# Altium PCB FrontPlate.PcbDoc
Units mil, origin at the board's own origin, x right, y up, seen from the top; angles counter-clockwise.
Board outline 3307.09 x 1122.05 mil, 2 copper layers (Top Layer, Bottom Layer), stack 42.17 mil thick; 1 components, 1 nets, 8 pads, 0 vias.
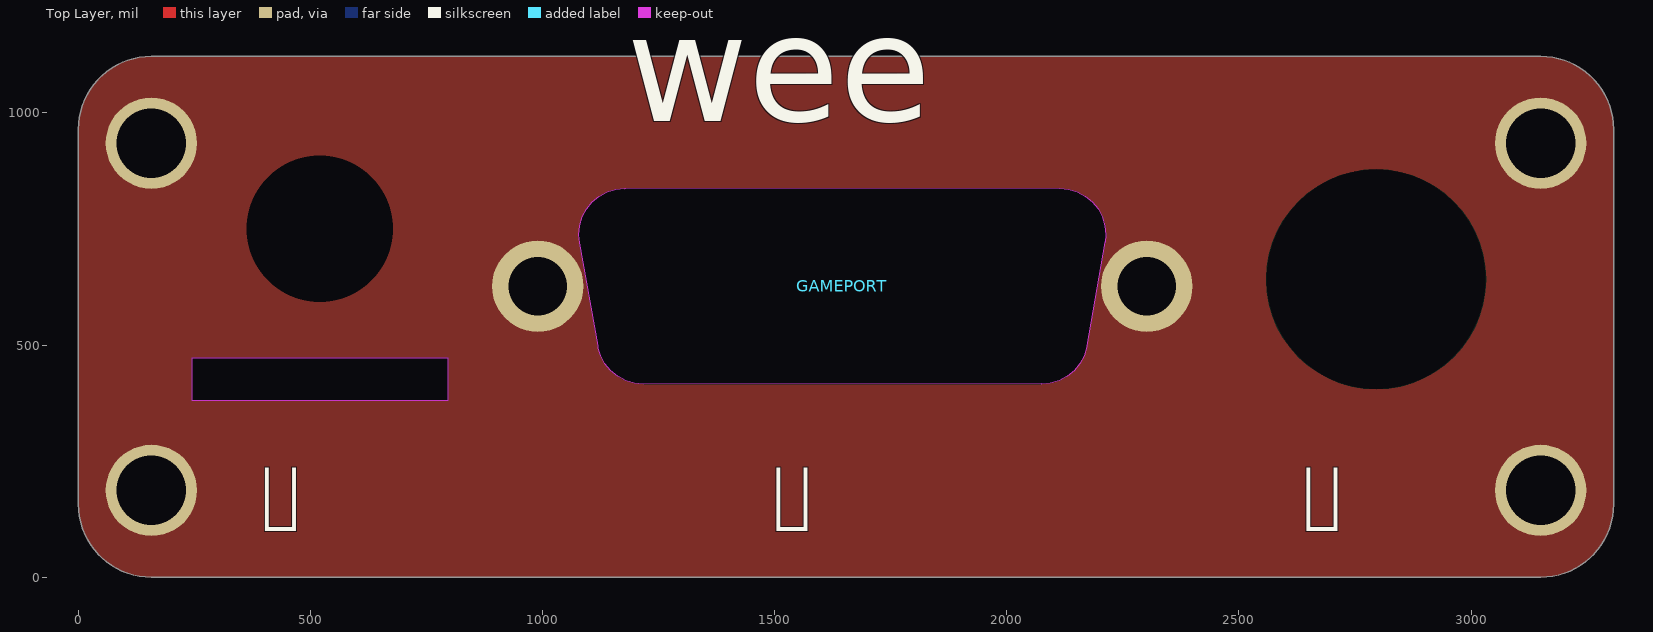
[diagram p0: Top Layer view]
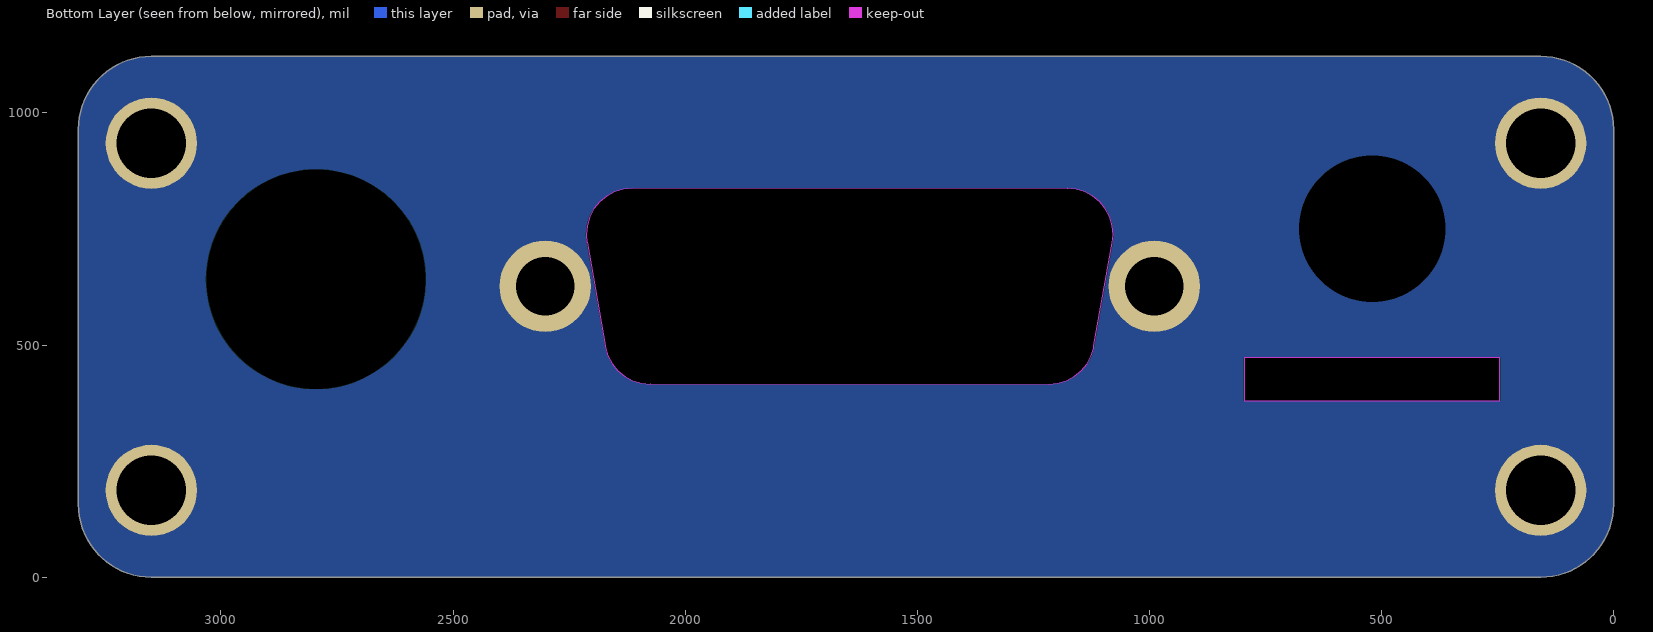
[diagram p1: Bottom Layer view, seen from below]

## Layer stack, top to bottom
Top Solder: solder mask 1, Solder Resist, Dk 3.5
Top Layer: signal copper 1.4
Dielectric 1: core 39.3701, FR-4, Dk 4.6
Bottom Layer: signal copper 1.4
Bottom Solder: solder mask 1, Solder Resist, Dk 3.5

## Board outline
157.48,0 cw(c157.48,157.48) 0,157.48 0,964.57 cw(c157.48,964.57) 157.48,1122.05 344.49,1122.05 2962.6,1122.05 3149.61,1122.05 cw(c3149.61,964.57) 3307.09,964.57 3307.09,157.48 cw(c3149.61,157.48) 3149.61,0 2962.6,0 344.49,0
cut-out: 796.06,380.32 244.88,380.32 244.88,472.44 796.06,472.44
cut-out: 2133.35,835.58 2151.98,829.93 2169.14,820.75 2184.19,808.4 2196.54,793.36 2205.71,776.19 2211.37,757.56 2213.27,738.19 2211.61,721.27 2211.29,721.03 2172.21,498.14 2172,495.98 2166.34,477.36 2157.17,460.19 2144.82,445.14 2129.77,432.79 2112.61,423.62 2093.98,417.97 2075.08,416.1 2074.61,416.54 1216.73,416.06 1197.36,417.97 1178.73,423.62 1161.57,432.79 1146.52,445.14 1134.17,460.19 1124.99,477.36 1120.17,493.25 1119.41,498.19 1079.76,720.98 1078.07,738.19 1079.97,757.56 1085.62,776.19 1094.8,793.36 1107.15,808.4 1122.2,820.75 1139.36,829.93 1157.99,835.58 1176.89,837.44 1177.36,837.01 2113.98,837.49

## Design rules (kind name [scope] priority, off if disabled: settings)
AssemblyTestPointUsage AssemblyTestPointUsage_1 [All] p2:
AssemblyTestpoint AssemblyTestpoint_1 [All] p2: testpointundercomponent=TRUE minsize=40 maxsize=100 preferedsize=60 minholesize=0 maxholesize=40 preferedholesize=32 testpointgrid=1 usegrid=TRUE gridtolerance=0.01 allowsidetop=TRUE allowsidebottom=TRUE
Clearance [All] p1: gap=10 ignorepadtopadclearanceinfootprint=FALSE
Clearance Clearance_1 [All] p2: gap=0.39 ignorepadtopadclearanceinfootprint=FALSE except(0: Arc-Hole Track-Hole SMDPad-Hole THPad-Hole Via-Hole Fill-Hole Poly-Hole Region-Hole Text-Hole)
ComponentClearance ComponentClearance_1 [All] p2: gap=10 collisioncheckmode=3 verticalgap=10 showdistances=FALSE
DiffPairsRouting DiffPairsRouting_1 [All] p2: maxlimit=10 minlimit=10 mostfreqgap=10 toplayer_minwidth=15 toplayer_maxwidth=15 toplayer_prefwidth=15 bottomlayer_minwidth=15 bottomlayer_maxwidth=15 bottomlayer_prefwidth=15 maxuncoupledlength=500
FabricationTestPointUsage FabricationTestPointUsage_1 [All] p2: valid=0 allowmultiple=FALSE
FabricationTestpoint FabricationTestpoint_1 [All] p2: side=3 testpointundercomponent=TRUE minsize=40 maxsize=100 preferedsize=60 minholesize=0 maxholesize=40 preferedholesize=32 testpointgrid=1 allowsidetop=TRUE allowsidebottom=TRUE usegrid=TRUE gridtolerance=0.01
FanoutControl Fanout_LCC [IsLCC] p1: bgadir=Out bgaviamode=Centered fanoutstyle=Auto fanoutdirection=Alternating viagrid=1 // Fanout_LCC (Default Rule)
FanoutControl Fanout_BGA [IsBGA] p2: bgadir=Out bgaviamode=Centered fanoutstyle=Auto fanoutdirection=Alternating viagrid=1 // Fanout_BGA (Default Rule)
FanoutControl Fanout_Default [All] p4: bgadir=Out bgaviamode=Centered fanoutstyle=Auto fanoutdirection=Alternating viagrid=1 // Fanout_Default (Default Rule)
FanoutControl Fanout_Small [(CompPinCount < 5)] p5: bgadir=Out bgaviamode=Centered fanoutstyle=Auto fanoutdirection=OutThenIn viagrid=1 // Fanout_Small (Default Rule)
FanoutControl Fanout_BGA_1 [IsBGA] p6: bgadir=Out bgaviamode=Centered fanoutstyle=Auto fanoutdirection=Alternating viagrid=1 // Fanout_BGA (Default Rule)
FanoutControl Fanout_LCC_1 [IsLCC] p7: bgadir=Out bgaviamode=Centered fanoutstyle=Auto fanoutdirection=Alternating viagrid=1 // Fanout_LCC (Default Rule)
FanoutControl Fanout_SOIC_1 [IsSOIC] p8: bgadir=Out bgaviamode=Centered fanoutstyle=Auto fanoutdirection=Alternating viagrid=1 // Fanout_SOIC (Default Rule)
FanoutControl Fanout_Small_1 [(CompPinCount < 5)] p9: bgadir=Out bgaviamode=Centered fanoutstyle=Auto fanoutdirection=OutThenIn viagrid=1 // Fanout_Small (Default Rule)
FanoutControl Fanout_Default_1 [All] p10: bgadir=Out bgaviamode=Centered fanoutstyle=Auto fanoutdirection=Alternating viagrid=1 // Fanout_Default (Default Rule)
Height Height_1 [All] p2: minheight=0 maxheight=1000 prefheight=500
HoleSize HoleSize_1 [All] p2: absolutevalues=TRUE maxlimit=100 minlimit=1 maxpercent=80.000 minpercent=20.000
HoleToHoleClearance HoleToHoleClearance_1 [All] p2: gap=10 allowstackedmicrovias=TRUE
LayerPairs LayerPairs_1 [All] p2: enforce=TRUE
MinimumSolderMaskSliver MinimumSolderMaskSliver_1 [All] p2: minsoldermaskwidth=10
NetAntennae NetAntennae_1 [All] p2: netantennaetolerance=0
PasteMaskExpansion PasteMaskExpansion_1 [All] p2: expansion=0
PlaneClearance PlaneClearance_1 [All] p2: clearance=20
PlaneConnect PlaneConnect_1 [All] p2: planeconnectstyle=Relief reliefexpansion=20 reliefentries=4 reliefconductorwidth=10 reliefairgap=10
PolygonConnect [All] p1: connectstyle=Relief reliefconductorwidth=10 reliefentries=4 polygonreliefangle="90 Angle" airgapwidth=10
PolygonConnect PolygonConnect_1 [All] p2: connectstyle=Direct reliefconductorwidth=10 reliefentries=4 polygonreliefangle="90 Angle" airgapwidth=10
RoutingCorners RoutingCorners_1 [All] p2: cornerstyle=45-Degree minsetback=100 maxsetback=100
RoutingLayers RoutingLayers_1 [All] p2: top layer_v5=TRUE bottom layer_v5=TRUE
RoutingPriority RoutingPriority_1 [All] p2: routingpriority=0
RoutingTopology RoutingTopology_1 [All] p2: topology=Shortest
RoutingVias [All] p1: holewidth=28 width=50 viastyle="Through Hole" minholewidth=28 minwidth=50 maxholewidth=28 maxwidth=50
RoutingVias RoutingVias_1 [All] p2: holewidth=28 width=50 viastyle="Through Hole" minholewidth=28 minwidth=50 maxholewidth=28 maxwidth=50
ShortCircuit ShortCircuit_1 [All] p2: allowed=FALSE
SilkToBoardRegionClearance SilkToBoardRegionClearance_1 [All] p2:
SilkToSilkClearance SilkToSilkClearance_1 [All] p2: silktosilkclearance=10
SilkToSolderMaskClearance SilkToSolderMaskClearance_1 [IsPad] p2: minsilkscreentomaskgap=10 clearancetoexposedcopper=TRUE
SolderMaskExpansion [All] p1: expansion=4 istentingtop=FALSE
SolderMaskExpansion SolderMaskExpansion_1 [All] p2: expansion=4 istentingtop=FALSE
UnRoutedNet UnRoutedNet_1 [All] p2:
UnpouredPolygon UnpouredPolygon_1 [All] p2:
Width [All] p1: maxlimit=10 minlimit=10 preferedwidth=10
Width Width_1 [All] p2: maxlimit=10 minlimit=10 preferedwidth=10
26 further rules are at their usual default settings.

## Components (designator, comment, footprint, x,y, rotation, side; value= is the part's Value field where it differs from the comment)
GAMEPORT "Comment" PCB-18hsnl1frgzo3abfncom-1 1645.67,626.77 r0 top

## Footprints (in the part's own frame and the unit in brackets; to place one, negate y for a bottom-side part, rotate by r counter-clockwise, add the part's x,y. Pads: shape width x height; smd on the part's side, far side on the other; paste and mask are expansions set on the pad)
PCB-18hsnl1frgzo3abfncom-1 [mm]
  round 5 hole 3.2: 1(-16.66,0) 2(16.66,0)

## Part data
GAMEPORT: library part "joystick panelmount-1"

## Free pads (board coordinates)
  round 196.85 hole 149.61: 1(157.48,935.04) 1(3149.61,935.04) 2(157.48,187.01) 2(3149.61,187.01)
  round 60 hole 472.44 unplated: 3(2795.28,641.73)
  round 60 hole 314.96: 4(519.85,750.64)

## Nets (pads, with @x,y where several pads share a name; then routed paths per layer and width w, separated by ;. In a path a pad name is that pad's centre, name@x,y a point inside that pad or via, vN(x,y) a via of type N, cw(c..) or ccw(c..) an arc to the next point about the centre after c; other vN are vias at no path point)
GND: GAMEPORT.1 GAMEPORT.2 pad.1 pad.2 pad.4

## Polygon pours and split planes (outlines as drawn)
GND on Top Layer "Mechanical 3-No Net" (solid, pour order 6): 157.48,0 cw(c157.48,157.48) 0,157.48 0,964.57 cw(c157.48,964.57) 157.48,1122.05 344.49,1122.05 2962.6,1122.05 3149.61,1122.05 cw(c3149.61,964.57) 3307.09,964.57 3307.09,157.48 cw(c3149.61,157.48) 3149.61,0 2962.6,0 344.49,0
GND on Bottom Layer "Mechanical 3-No Net" (solid, pour order 8): 157.48,0 cw(c157.48,157.48) 0,157.48 0,964.57 cw(c157.48,964.57) 157.48,1122.05 344.49,1122.05 2962.6,1122.05 3149.61,1122.05 cw(c3149.61,964.57) 3307.09,964.57 3307.09,157.48 cw(c3149.61,157.48) 3149.61,0 2962.6,0 344.49,0
GND on Bottom Solder "Mechanical 3-No Net" (solid): 157.48,0 cw(c157.48,157.48) 0,157.48 0,964.57 cw(c157.48,964.57) 157.48,1122.05 344.49,1122.05 2962.6,1122.05 3149.61,1122.05 cw(c3149.61,964.57) 3307.09,964.57 3307.09,157.48 cw(c3149.61,157.48) 3149.61,0 2962.6,0 344.49,0

## Silkscreen, mask and mechanical layers (free items; w line width, h text height)
Top Overlay:
  text "wee" at 1181.1,905.51 h400
  text "" at 393.7,39.37 h314.96
  text "" at 1496.06,39.37 h314.96
  text "" at 2637.8,39.37 h314.96
Top Solder:
  text "Cee" at 1653.54,905.51 h400
Mechanical 3:
  lines w10: 0,157.48 ccw(c157.48,157.48) 157.48,0 344.49,0 2962.6,0 3149.61,0 ccw(c3149.61,157.48) 3307.09,157.48 3307.09,964.57 ccw(c3149.61,964.57) 3149.61,1122.05 2962.6,1122.05 344.49,1122.05 157.48,1122.05 ccw(c157.48,964.57) 0,964.57 0,157.48 ; 244.88,380.32 796.06,380.32 796.06,472.44 244.88,472.44 244.88,380.32
Assembly Top:
  lines w10: 344.49,0 157.48,0 cw(c157.48,157.48) 0,157.48 0,964.57 cw(c157.48,964.57) 157.48,1122.05 344.49,1122.05 ; 364.17,29.53 1653.54,29.53 2942.91,29.53 ; 364.17,1092.52 1653.54,1092.52 2942.91,1092.52 ; 2962.6,0 3149.61,0 ccw(c3149.61,157.48) 3307.09,157.48 3307.09,964.57 ccw(c3149.61,964.57) 3149.61,1122.05 2962.6,1122.05